# Altium PCB PCB1 - 2020-12-29T100413.193482Z.PcbDoc
Units mil, origin at the board's own origin, x right, y up, seen from the top; angles counter-clockwise.
Board outline 6000 x 4000 mil, 2 copper layers (Top Layer, Bottom Layer); 44 components, 102 nets, 337 pads, 0 vias.
Unrouted connection lines stored in the file: 188.
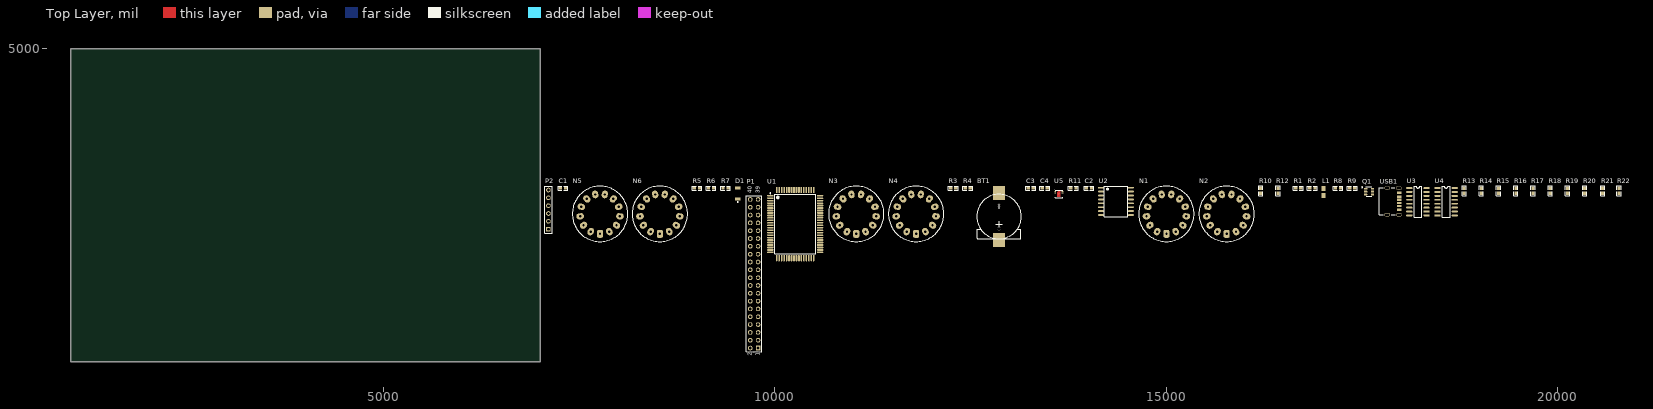
[diagram p0: Top Layer view]
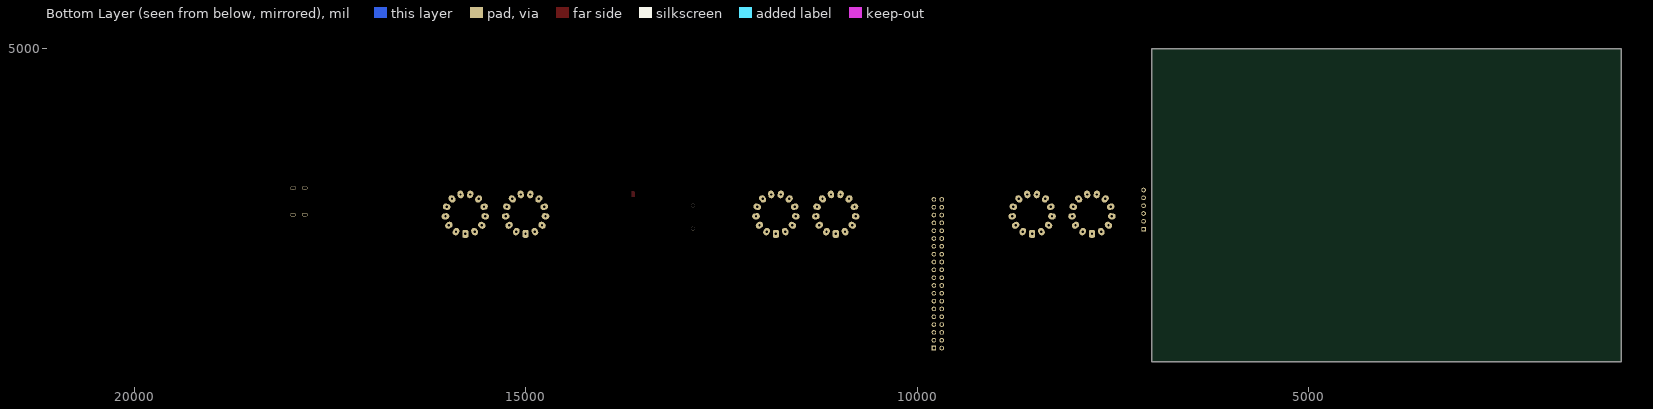
[diagram p1: Bottom Layer view, seen from below]

## Layer stack, top to bottom
Top Solder: solder mask 0.4, Solder Resist, Dk 3.5
Top Layer: signal copper 1.4
Dielectric 1: dielectric 12.6, FR-4, Dk 4.8
Bottom Layer: signal copper 1.4
Bottom Solder: solder mask 0.4, Solder Resist, Dk 3.5

## Board outline
1000,1000 7000,1000 7000,5000 1000,5000

## Design rules (kind name [scope] priority, off if disabled: settings)
Clearance [All] p1: gap=10 ignorepadtopadclearanceinfootprint=FALSE except(0: Arc-Hole Track-Hole SMDPad-Hole THPad-Hole Via-Hole Fill-Hole Poly-Hole Region-Hole Text-Hole)
PolygonConnect [All] p1: connectstyle=Relief reliefconductorwidth=10 reliefentries=4 polygonreliefangle="90 Angle" airgapwidth=10
RoutingVias [All] p1: holewidth=28 width=50 viastyle="Through Hole" minholewidth=28 minwidth=50 maxholewidth=28 maxwidth=50
SolderMaskExpansion [All] p1: expansion=4 istentingtop=FALSE
Width [All] p1: maxlimit=10 minlimit=10 preferedwidth=10
30 further rules are at their usual default settings.

## Components (designator, comment, footprint, x,y, rotation, side; value= is the part's Value field where it differs from the comment)
BT1 "CR1220 holder" BAT1220 12865,2855 r0 top
C1 "Cap" C0603 7290,3220 r0 top value=100pF
C2 "Cap Semi" C0603 14015,3220 r0 top value=104
C3 "Cap Semi" C0603 13270,3220 r0 top value=104
C4 "Cap" C0603 13450,3220 r0 top value=100nF
D1 "ZM75" LL-34 9525,3150 r90 top
L1 "L0" 0805 17015,3125 r90 top
N1 "ИН-14" IN14 15005,2890 r0 top
N2 "ИН-14" IN14 15775,2890 r0 top
N3 "ИН-14" IN14 11040,2890 r0 top
N4 "ИН-14" IN14 11805,2890 r0 top
N5 "ИН-14" IN14 7765,2890 r0 top
N6 "ИН-14" IN14 8530,2890 r0 top
P1 "Rasp GPIO" HDR2X20 9785,1175 r90 top
P2 "Header 6" HDR1X6 7105,2695 r90 top
Q1 "PMOS-AO6401A" SOT95P250X110-6N 17595,3175 r0 top
R1 "Res Semi" R0603 16690,3220 r0 top value=20K
R2 "Res Semi" R0603 16870,3220 r0 top value=20K
R3 "Res Semi" R0603 12280,3220 r0 top value=20K
R4 "Res Semi" R0603 12465,3220 r0 top value=20K
R5 "Res Semi" R0603 9005,3220 r0 top value=20K
R6 "Res Semi" R0603 9185,3220 r0 top value=20K
R7 "Res Semi" R0603 9370,3220 r0 top value=240K
R8 "Res Semi" R0603 17200,3220 r0 top value=5.1K
R9 "Res Semi" R0603 17380,3220 r0 top value=5.1K
R10 "Res Semi" R0603 16210,3185 r90 top value=4.7K
R11 "Res Semi" R0603 13815,3220 r0 top value=10K
R12 "Res Semi" R0603 16430,3185 r90 top value=4.7K
R13 "Res Semi" R0603 18810,3185 r90 top value=150
R14 "Res Semi" R0603 19030,3185 r90 top value=1.9K
R15 "Res Semi" R0603 19250,3185 r90 top value=1.9K
R16 "Res Semi" R0603 19470,3185 r90 top value=1.9K
R17 "Res Semi" R0603 19690,3185 r90 top value=1.9K
R18 "Res Semi" R0603 19910,3185 r90 top value=150
R19 "Res Semi" R0603 20130,3185 r90 top value=1.9K
R20 "Res Semi" R0603 20350,3185 r90 top value=1.9K
R21 "Res Semi" R0603 20580,3185 r90 top value=1.9K
R22 "Res Semi" R0603 20790,3185 r90 top value=1.9K
U1 "HV57708" HV57708PG 10260,2760 r0 top
U2 "DS3231" SOP16_75MM 14360,3050 r0 top
U3 "TLP290-4" SO16 18220,3045 r0 top
U4 "TLP290-4" SO16 18580,3045 r0 top
U5 "SHT31" SHT3x-x-P 13630,3145 r0 top
USB1 "USB3-TypeC-6p" USB-TYPE-C-SMD6 17905,3050 r0 top

## Footprints (in the part's own frame and the unit in brackets; to place one, negate y for a bottom-side part, rotate by r counter-clockwise, add the part's x,y. Pads: shape width x height; smd on the part's side, far side on the other; paste and mask are expansions set on the pad)
0805 [mil] "1/8W"
  rect 60x50 smd: 1(0,0) 2(90,0)
BAT1220 [mm]
  round 1.2 hole 1.3 unplated: 0(0,-3.886)
  round 1.2 hole 1.2 unplated: 0(0,3.607)
  rect 4x4.5 smd: 1(0,-7.595) 2(0,7.645)
  silkscreen extent -7.22,-7.19 7.22,7.24
C0603 [mm] "Chip Resistor; Body 1.6 x 0.8 mm (LxW typ)"
  rect 1.1x1 smd: 1(-0.85,-0.025) 2(0.85,-0.025)
  silkscreen extent -1.57,-0.71 1.57,0.66
HDR1X6 [mm] "Connector; Header; 6 Position"
  rect 1.5x1.5 hole 0.9: 1(0,0)
  round 1.5 hole 0.9: 2(2.54,0) 3(5.08,0) 4(7.62,0) 5(10.16,0) 6(12.7,0)
  silkscreen extent -1.27,-1.27 13.97,1.27
HDR2X20 [mm] "Connector; Header; 20x2 Position"
  rect 1.5x1.5 hole 0.9: 1(0,0)
  round 1.5 hole 0.9: 2(0,2.54) 3(2.54,0) 4(2.54,2.54) 5(5.08,0) 6(5.08,2.54) 7(7.62,0) 8(7.62,2.54) 9(10.16,0) 10(10.16,2.54) 11(12.7,0) 12(12.7,2.54) 13(15.24,0) 14(15.24,2.54) 15(17.78,0) 16(17.78,2.54) 17(20.32,0) 18(20.32,2.54) 19(22.86,0) 20(22.86,2.54) 21(25.4,0) 22(25.4,2.54) 23(27.94,0) 24(27.94,2.54) 25(30.48,0) 26(30.48,2.54) 27(33.02,0) 28(33.02,2.54) 29(35.56,0) 30(35.56,2.54) 31(38.1,0) 32(38.1,2.54) 33(40.64,0) 34(40.64,2.54) 35(43.18,0) 36(43.18,2.54) 37(45.72,0) 38(45.72,2.54) 39(48.26,0) 40(48.26,2.54)
  silkscreen extent -1.27,-1.27 49.53,3.81
HV57708PG [mm] "QFP, 80-Leads, Body 17.40x23.40mm, Pitch 0.80mm, IPC Medium Density"
  oval 2.05x0.55 smd: 1(-8.075,9.2) 2(-8.075,8.4) 3(-8.075,7.6) 4(-8.075,6.8) 5(-8.075,6) 6(-8.075,5.2) 7(-8.075,4.4) 8(-8.075,3.6) 9(-8.075,2.8) 10(-8.075,2) 11(-8.075,1.2) 12(-8.075,0.4) 13(-8.075,-0.4) 14(-8.075,-1.2) 15(-8.075,-2) 16(-8.075,-2.8) 17(-8.075,-3.6) 18(-8.075,-4.4) 19(-8.075,-5.2) 20(-8.075,-6) 21(-8.075,-6.8) 22(-8.075,-7.6) 23(-8.075,-8.4) 24(-8.075,-9.2) 41(8.075,-9.2) 42(8.075,-8.4) 43(8.075,-7.6) 44(8.075,-6.8) 45(8.075,-6) 46(8.075,-5.2) 47(8.075,-4.4) 48(8.075,-3.6) 49(8.075,-2.8) 50(8.075,-2) 51(8.075,-1.2) 52(8.075,-0.4) 53(8.075,0.4) 54(8.075,1.2) 55(8.075,2) 56(8.075,2.8) 57(8.075,3.6) 58(8.075,4.4) 59(8.075,5.2) 60(8.075,6) 61(8.075,6.8) 62(8.075,7.6) 63(8.075,8.4) 64(8.075,9.2)
  oval 0.55x2.05 smd: 25(-6,-11.075) 26(-5.2,-11.075) 27(-4.4,-11.075) 28(-3.6,-11.075) 29(-2.8,-11.075) 30(-2,-11.075) 31(-1.2,-11.075) 32(-0.4,-11.075) 33(0.4,-11.075) 34(1.2,-11.075) 35(2,-11.075) 36(2.8,-11.075) 37(3.6,-11.075) 38(4.4,-11.075) 39(5.2,-11.075) 40(6,-11.075) 65(6,11.075) 66(5.2,11.075) 67(4.4,11.075) 68(3.6,11.075) 69(2.8,11.075) 70(2,11.075) 71(1.2,11.075) 72(0.4,11.075) 73(-0.4,11.075) 74(-1.2,11.075) 75(-2,11.075) 76(-2.8,11.075) 77(-3.6,11.075) 78(-4.4,11.075) 79(-5.2,11.075) 80(-6,11.075)
  silkscreen extent -8.2,-9.65 6.65,10.15
IN14 [mm]
  rrect50% 2x2.5 hole 0.762: 1(0,-6.5)
  oval 2x2.5 hole 0.762 rot 152.31: 2(-3.021,-5.755)
  oval 2x2.5 hole 0.762 rot 124.62: 3(-5.349,-3.692)
  oval 2x2.5 hole 0.762 rot 96.92: 4(-6.453,-0.784)
  oval 2x2.5 hole 0.762 rot 69.23: 5(-6.078,2.305)
  oval 2x2.5 hole 0.762 rot 41.54: 6(-4.31,4.865)
  oval 2x2.5 hole 0.762 rot 13.85: 7(-1.556,6.311)
  oval 2x2.5 hole 0.762 rot 166.15: 8(1.555,6.311)
  oval 2x2.5 hole 0.762 rot 138.46: 9(4.31,4.866)
  oval 2x2.5 hole 0.762 rot 110.77: 10(6.077,2.305)
  oval 2x2.5 hole 0.762 rot 83.08: 11(6.453,-0.784)
  oval 2x2.5 hole 0.762 rot 55.38: 12(5.349,-3.692)
  oval 2x2.5 hole 0.762 rot 27.69: 13(3.021,-5.755)
  silkscreen extent -9,-9 9,9
LL-34 [mm]
  rect 0.95x1.65 smd: 1(-1.75,0) 2(1.75,0)
  silkscreen extent -2.87,-0.13 -2.63,0.12
R0603 [mm] "Chip Resistor; Body 1.6 x 0.8 mm (LxW typ)"
  rect 1.1x1 smd: 1(-0.85,-0.025) 2(0.85,-0.025)
  silkscreen extent -1.57,-0.71 1.57,0.66
SHT3x-x-P [mm] "SHT3x with Plastic"
  rrect50% 0.55x0.25 smd mask+0.05: 1(-1.175,0.75)
  rrect20% 0.55x0.25 smd mask+0.05: 2(-1.175,0.25) 3(-1.175,-0.25) 4(-1.175,-0.75) 5(1.175,-0.75) 6(1.175,-0.25) 7(1.175,0.25) 8(1.175,0.75)
  round 0.2 smd mask+0.05: 9(0,0)
  Top Layer region: 0.5,-0.85 -0.5,-0.85 -0.5,0.55 -0.2,0.85 0.5,0.85
  silkscreen extent -1.55,-1.25 1.25,1.35, body extent -1.25,-1.7 1.25,2.65, height 1.25
SO16 [mil] "封装库来自淘宝卖家 ID：黄晶宝石，其他均为盗版"
  oval 80x24 smd: 1(-110,175) 2(-110,125) 3(-110,75) 4(-110,25) 5(-110,-25) 6(-110,-75) 7(-110,-125) 8(-110,-175) 9(110,-175) 10(110,-125) 11(110,-75) 12(110,-25) 13(110,25) 14(110,75) 15(110,125) 16(110,175)
  silkscreen extent -50,-200 50,200, body extent -118,-197 118,197, height 75
SOP16_75MM [mm]
  oval 1.9x0.6 smd: 1(-4.85,4.445) 2(-4.85,3.175) 3(-4.85,1.905) 4(-4.85,0.635) 5(-4.85,-0.635) 6(-4.85,-1.905) 7(-4.85,-3.175) 8(-4.85,-4.445) 9(4.85,-4.445) 10(4.85,-3.175) 11(4.85,-1.905) 12(4.85,-0.635) 13(4.85,0.635) 14(4.85,1.905) 15(4.85,3.175) 16(4.85,4.445)
  silkscreen extent -3.75,-4.95 3.75,4.95
SOT95P250X110-6N [mm]
  rrect50% 1.11x0.55 smd: 1(-1.11,0.95) 2(-1.11,0) 3(-1.11,-0.95) 4(1.11,-0.95) 5(1.11,0) 6(1.11,0.95)
  silkscreen extent -2.39,-1.55 0.85,1.55
USB-TYPE-C-SMD6 [mm]
  oval 1.8x1.1 hole 0.7 slot 1.401 at 0 deg: 0(-1.975,-4.32) 0(-1.975,4.32) 0(1.825,-4.32) 0(1.825,4.32)
  rect 1.5x0.8 smd: 1(1.975,2.75) 6(1.975,-2.75)
  rect 1.5x0.76 smd: 2(1.975,1.52) 5(1.975,-1.52)
  rect 1.5x0.7 smd: 3(1.975,0.5) 4(1.975,-0.5)
  silkscreen extent -4.58,-4.41 0.56,4.41

## Part data
BT1: library part BATTERY
C1 C4: "Capacitor", LatestRevisionDate=17-Jul-2002, LatestRevisionNote="Re-released for DXP Platform.", PackageDescription="Radial Cap, Thru-Hole; 2 Leads; 0.3 in Pin Spacing", PackageReference=RAD-0.3, Published=8-Jun-2000, Publisher="Altium Limited"
C2 C3: "Capacitor (Semiconductor SIM Model)", LatestRevisionDate=17-Jul-2002, LatestRevisionNote="Re-released for DXP Platform.", PackageReference=C1206, Published=8-Jun-2000, Publisher="Altium Limited"
D1: library part "Diode 11DQ03", "Schottky Rectifier", Code_JEDEC=DO-204-AL, ComponentLink1Description="Manufacturer Link", ComponentLink1URL=http://www.irf.com/, ComponentLink2Description=Datasheet, ComponentLink2URL=http://www.irf.com/product-info/datasheets/data/11dq03.pdf, DatasheetVersion=Dec-1997, LatestRevisionDate=17-Jul-2002, LatestRevisionNote="Re-released for DXP Platform.", PackageDescription="Diode, Axial; Body 5.2 x 2.7 mm (LxDia. max), Lead Dia. 0.86 mm (max)", PackageReference=DO-204AL, Published=8-Jun-2000, Publisher="Altium Limited"
P1: library part "Header 20X2", "Header, 20-Pin, Dual row", LatestRevisionDate=17-Jul-2002, LatestRevisionNote="Re-released for DXP Platform.", Publisher="Altium Limited"
P2: "Header, 6-Pin", LatestRevisionDate=17-Jul-2002, LatestRevisionNote="Re-released for DXP Platform.", Publisher="Altium Limited"
Q1: library part PMOS-2, "P-Channel Power MOSFET", ComponentLink1Description="Manufacturer Link", ComponentLink1URL=http://www.irf.com/, DatasheetVersion=PD-9.390D, LatestRevisionDate=17-Jul-2002, LatestRevisionNote="Re-released for DXP Platform.", Note="Pin 4 not drawn and electrically connected to Pin 2.", PackageDescription="TO, Thru-Hole, Vertical, Heatsink Mounted; 3 In-Line Leads; Pitch 2.54 mm", PackageReference=TO-220AB, PackageVersion=Feb-1997, Published=8-Jun-2000, Publisher="Altium Limited"
R1 R2 R3 R4 R5 R6 R7 R8 R9 R10 R11 R12 R13 R14 R15 R16 R17 R18 R19 R20 R21 R22: "Semiconductor Resistor", LatestRevisionDate=17-Jul-2002, LatestRevisionNote="Re-released for DXP Platform.", PackageReference=AXIAL-0.5, Published=8-Jun-2000, Publisher="Altium Limited"

## Nets (pads, with @x,y where several pads share a name; then routed paths per layer and width w, separated by ;. In a path a pad name is that pad's centre, name@x,y a point inside that pad or via, vN(x,y) a via of type N, cw(c..) or ccw(c..) an arc to the next point about the centre after c; other vN are vias at no path point)
\I\N\T\/SQW: R11.1 U2.3
Boost_switch: Q1.1 R22.1 U4.10
DGND: BT1.2 C2.2 C3.1 L1.1 P2.6 U2.5 U2.6 U2.7 U2.8 U2.9 U2.10 U2.11 U2.12 U2.13
GND: C1.1 C4.1 D1.1 L1.2 P1.6 P1.9 P1.14 P1.20 P1.25 P1.30 P1.34 P1.39 R8.2 R9.2 U1.34 U3.9 U3.11 U3.13 U3.15 U4.9 U4.11 U4.13 U4.15 U5.2 U5.7 U5.8 U5.9 USB1.1 USB1.6
HV_CLK: R20.1 U1.30 U4.14
HV_DIN1: R14.1 U1.25 U3.16
HV_DIN2: R15.1 U1.26 U3.14
HV_DIN3: R16.1 U1.27 U3.12
HV_DIN4: R17.1 U1.28 U3.10
HV_LE: R19.1 U1.29 U4.16
HV_POL: R21.1 U1.35 U4.12
I2C_SCL: P1.5 R12.1 U2.16 U5.4
I2C_SDA: P1.3 R10.1 U2.15 U5.1
N1_0: N1.12 U1.15
N1_1: N1.3 U1.24
N1_2: N1.4 U1.23
N1_3: N1.5 U1.22
N1_4: N1.6 U1.21
N1_5: N1.7 U1.20
N1_6: N1.8 U1.19
N1_7: N1.9 U1.18
N1_8: N1.10 U1.17
N1_9: N1.11 U1.16
N2_0: N2.12 U1.5
N2_1: N2.3 U1.14
N2_2: N2.4 U1.13
N2_3: N2.5 U1.12
N2_4: N2.6 U1.11
N2_5: N2.7 U1.10
N2_6: N2.8 U1.9
N2_7: N2.9 U1.8
N2_8: N2.10 U1.7
N2_9: N2.11 U1.6
N3_0: N3.12 U1.75
N3_1: N3.3 U1.4
N3_2: N3.4 U1.3
N3_3: N3.5 U1.2
N3_4: N3.6 U1.1
N3_5: N3.7 U1.80
N3_6: N3.8 U1.79
N3_7: N3.9 U1.78
N3_8: N3.10 U1.77
N3_9: N3.11 U1.76
N4_0: N4.12 U1.65
N4_1: N4.3 U1.74
N4_2: N4.4 U1.73
N4_3: N4.5 U1.72
N4_4: N4.6 U1.71
N4_5: N4.7 U1.70
N4_6: N4.8 U1.69
N4_7: N4.9 U1.68
N4_8: N4.10 U1.67
N4_9: N4.11 U1.66
N5_0: N5.12 U1.55
N5_1: N5.3 U1.64
N5_2: N5.4 U1.63
N5_3: N5.5 U1.62
N5_4: N5.6 U1.61
N5_5: N5.7 U1.60
N5_6: N5.8 U1.59
N5_7: N5.9 U1.58
N5_8: N5.10 U1.57
N5_9: N5.11 U1.56
N6_0: N6.12 U1.45
N6_1: N6.3 U1.54
N6_2: N6.4 U1.53
N6_3: N6.5 U1.52
N6_4: N6.6 U1.51
N6_5: N6.7 U1.50
N6_6: N6.8 U1.49
N6_7: N6.9 U1.48
N6_8: N6.10 U1.47
N6_9: N6.11 U1.46
"NetB_DC IN": Q1.2
NetBT1_1: BT1.1 C3.2 U2.14
NetD1_2: D1.2 R7.1 U1.40
NetN1_1: N1.1 R1.1
NetN2_1: N2.1 R2.1
NetN3_1: N3.1 R3.1
NetN4_1: N4.1 R4.1
NetN5_1: N5.1 R5.1
NetN6_1: N6.1 R6.1
NetQ1_3: Q1.3
NetR8_1: R8.1 USB1.4
NetR9_1: R9.1 USB1.3
NetR13_1: R13.1 U3.2 U3.4 U3.6 U3.8
NetR18_1: R18.1 U4.2 U4.4 U4.6 U4.8
RP_Boost: P1.15 U4.7
RP_CLK: P1.12 U4.3
RP_DIN1: P1.7 U3.1
RP_DIN2: P1.32 U3.3
RP_DIN3: P1.8 U3.5
RP_DIN4: P1.11 U3.7
RP_LE: P1.33 U4.1
RP_POL: P1.13 U4.5
SPI_CE1: P1.26 P2.5
SPI_MISO: P1.21 P2.3
SPI_MOSI: P1.19 P2.2
SPI_SCLK: P1.23 P2.4
V3.3: C2.1 C4.2 P1.1 P1.17 R10.2 R11.2 R12.2 R13.2 R18.2 U2.2 U5.5
V5: C1.2 P1.2 P1.4 P2.1 R14.2 R15.2 R16.2 R17.2 R19.2 R20.2 R21.2 R22.2 U1.31 U1.32 U1.33 USB1.2 USB1.5
V170: R1.2 R2.2 R3.2 R4.2 R5.2 R6.2 R7.2
pads on no net: BT1.0 N1.2 N1.13 N2.2 N2.13 N3.2 N3.13 N4.2 N4.13 N5.2 N5.13 N6.2 N6.13 P1.10 P1.16 P1.18 P1.22 P1.24 P1.27 P1.28 P1.29 P1.31 P1.35 P1.36 P1.37 P1.38 P1.40 Q1.4 Q1.5 Q1.6 U1.36 U1.37 U1.38 U1.39 U1.41 U1.42 U1.43 U1.44 U2.1 U2.4 U5.3 U5.6 USB1.0

## Text inside footprints (layer, text, board x,y; h text height)
P1: Top Overlay "1" at 9805,1075 h50 r90; Top Overlay "2" at 9705,1075 h50 r90; Top Overlay "40" at 9705,3155 h50 r90; Top Overlay "39" at 9805,3155 h50 r90